# EAGLE board AugmentedStethoscope_v2 (EAGLE 8.6.3)
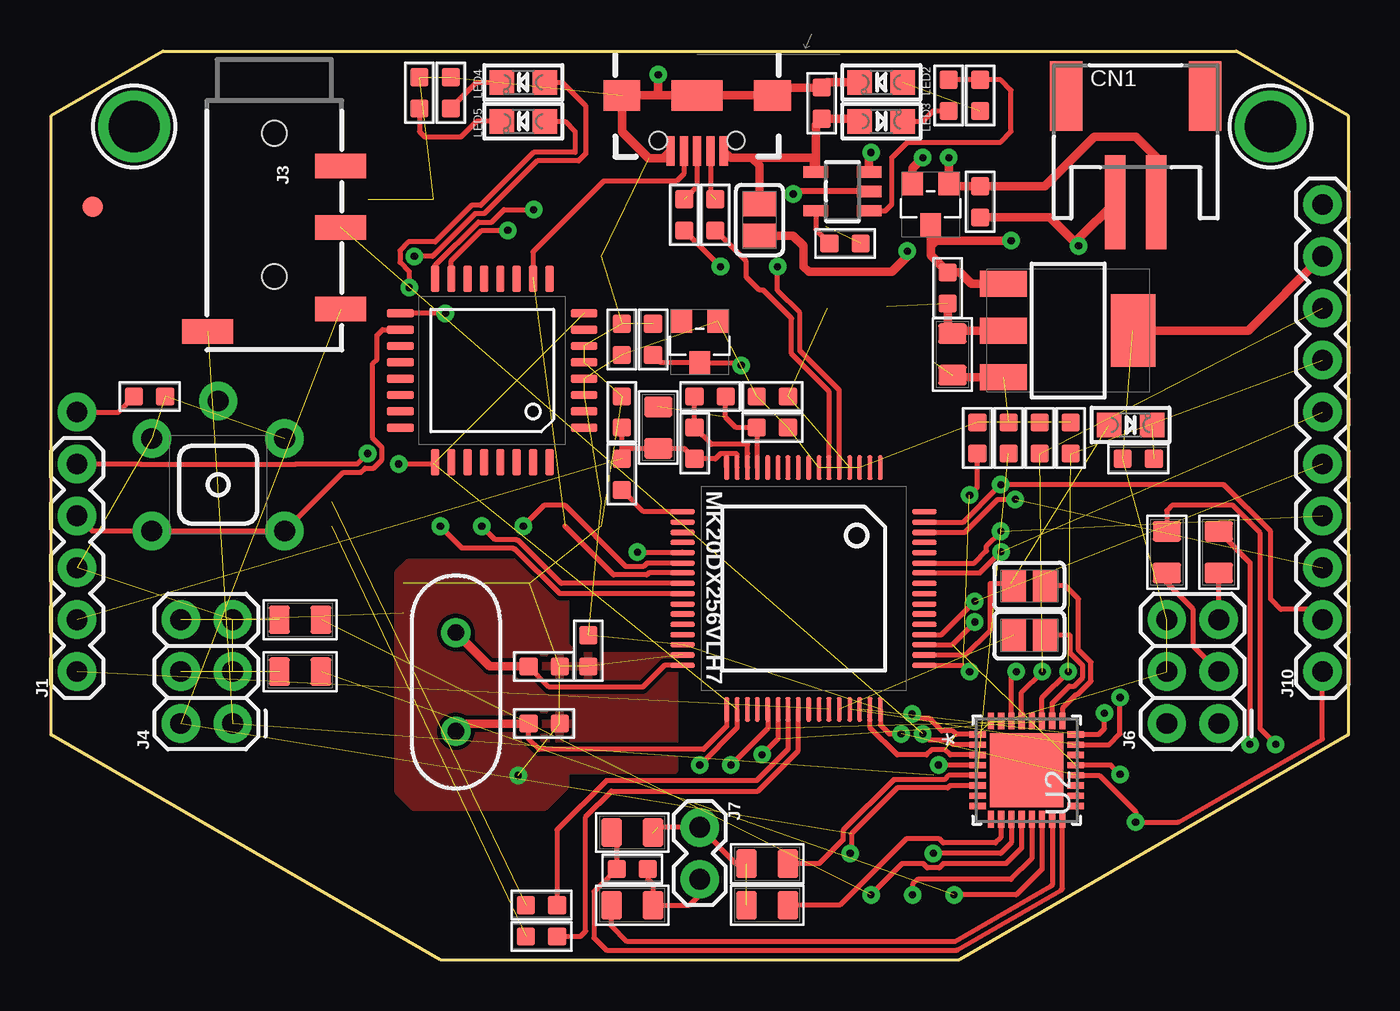
[diagram p0: board, top side]
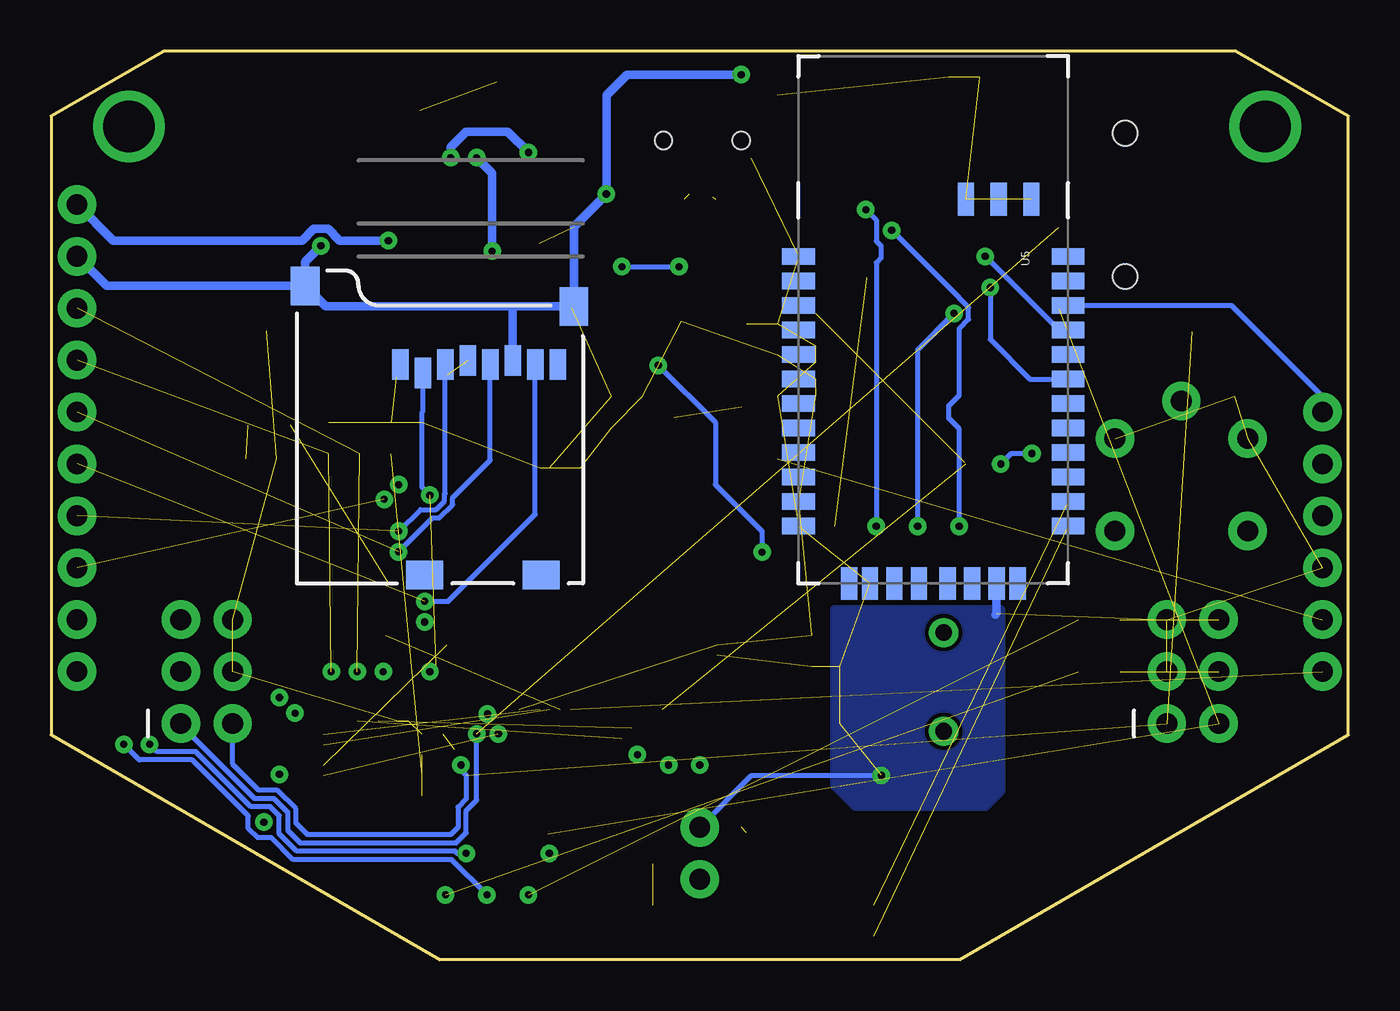
[diagram p1: board, bottom side, seen from below]

Size 63.5 x 44.45 mm. Coordinates in mm from the lower left corner, seen from the top.
Outline: 5.5,44.45 58,44.45 63.5,41.28 63.5,11 44.45,0 19.05,0 0,11 0,41.28 5.5,44.45
Copper layers (1*16): Top 0.035mm / dielectric 1.5mm / Bottom 0.035mm
Design rules "SparkFun *": minimum track width 8mil, minimum drill 10mil, track to track 6mil, track to pad 6mil, pad to pad 6mil, via to via 6mil, smd to smd 4mil, copper to edge 10mil, drill to drill 8mil, minimum pad ring 12mil, minimum via ring 10mil, stop-mask expansion 4mil, vias tented up to drill 25mil, thermal gap 8mil
Net classes: 0 default: width 0.254 mm, drill 0.203 mm, clearance 0.152 mm; 1 power: width 0.406 mm, drill 0.203 mm, clearance 0.203 mm

## Footprints (pad centres in the part's own frame; a part is rotated, then mirrored left to right if it is on the bottom)
C0603 = smd 0.889 x 0.889: 1 0,0.762; 2 0,-0.762
C0805 = smd 1.397 x 1.016: 1 0,1.016; 2 0,-1.016
JSTPH2 = smd 1 x 4.6: 1 -1,-3.7; 2 1,-3.7 | smd 1.6 x 3.4: NC1 -3.4,1.5; NC2 3.4,1.5
FIDUCIAL_1MM = smd 1 x 1: 1 0,0
HC49US = drill 0.813: 1 -2.413,0; 2 2.413,0
1X05 = drill 1.016 pad 1.88: 1 0,0; 2 2.54,0; 3 5.08,0; 4 7.62,0; 5 10.16,0
AUDIO_JACK_3.5MM_TRRS_SMD_RA = smd 1.2 x 2.5: EARTH 11.3,-3.25; RING1 6.2,3.25; RING2 3.2,3.25; TIP 10.2,3.25 | hole 1.2: 1.6,0; 8.6,0
2X3 = drill 1.016 pad 1.88: 1 0,0; 2 0,2.54; 3 2.54,0; 4 2.54,2.54; 5 5.08,0; 6 5.08,2.54
1X02 = drill 1.016 pad 1.88: 1 0,0; 2 2.54,0
USB-B-MICRO-SMD = smd 1.45 x 0.4: D+ 2.725,0; D- 2.725,0.65; GND 2.725,-1.3; ID 2.725,-0.65; VBUS 2.725,1.3 | smd 1.5 x 1.8: SHIELD1 0,3.685; SHIELD2 0,-3.685 | smd 1.5 x 2.5: SHIELD3 0,0 | hole 0.85: 2.2,1.9; 2.2,-1.9
1X10 = drill 1.016 pad 1.88: 1 0,0; 2 2.54,0; 3 5.08,0; 4 7.62,0; 5 10.16,0; 6 12.7,0; 7 15.24,0; 8 17.78,0; 9 20.32,0; 10 22.86,0
1X01NS = drill 1.016 pad 1.88: 1 0,0
LQFP32-08 = smd 1.3 x 0.4: 1 -4.493,2.8; 2 -4.493,2; 3 -4.493,1.2; 4 -4.493,0.4; 5 -4.493,-0.4; 6 -4.493,-1.2; 7 -4.493,-2; 8 -4.493,-2.8; 17 4.493,-2.8; 18 4.493,-2; 19 4.493,-1.2; 20 4.493,-0.4; 21 4.493,0.4; 22 4.493,1.2; 23 4.493,2; 24 4.493,2.8 | smd 0.4 x 1.3: 9 -2.8,-4.493; 10 -2,-4.493; 11 -1.2,-4.493; 12 -0.4,-4.493; 13 0.4,-4.493; 14 1.2,-4.493; 15 2,-4.493; 16 2.8,-4.493; 25 2.8,4.493; 26 2,4.493; 27 1.2,4.493; 28 0.4,4.493; 29 -0.4,4.493; 30 -1.2,4.493; 31 -2,4.493; 32 -2.8,4.493
LQFP64-05 = smd 1.2 x 0.25: 1 -5.915,3.759; 2 -5.915,3.251; 3 -5.915,2.743; 4 -5.915,2.261; 5 -5.915,1.753; 6 -5.915,1.245; 7 -5.915,0.762; 8 -5.915,0.254; 9 -5.915,-0.254; 10 -5.915,-0.762; 11 -5.915,-1.245; 12 -5.915,-1.753; 13 -5.915,-2.261; 14 -5.915,-2.743; 15 -5.915,-3.251; 16 -5.915,-3.759; 33 5.915,-3.759; 34 5.915,-3.251; 35 5.915,-2.743; 36 5.915,-2.261; 37 5.915,-1.753; 38 5.915,-1.245; 39 5.915,-0.762; 40 5.915,-0.254; 41 5.915,0.254; 42 5.915,0.762; 43 5.915,1.245; 44 5.915,1.753; 45 5.915,2.261; 46 5.915,2.743; 47 5.915,3.251; 48 5.915,3.759 | smd 0.25 x 1.2: 17 -3.759,-5.915; 18 -3.251,-5.915; 19 -2.743,-5.915; 20 -2.261,-5.915; 21 -1.753,-5.915; 22 -1.245,-5.915; 23 -0.762,-5.915; 24 -0.254,-5.915; 25 0.254,-5.915; 26 0.762,-5.915; 27 1.245,-5.915; 28 1.753,-5.915; 29 2.261,-5.915; 30 2.743,-5.915; 31 3.251,-5.915; 32 3.759,-5.915; 49 3.759,5.915; 50 3.251,5.915; 51 2.743,5.915; 52 2.261,5.915; 53 1.753,5.915; 54 1.245,5.915; 55 0.762,5.915; 56 0.254,5.915; 57 -0.254,5.915; 58 -0.762,5.915; 59 -1.245,5.915; 60 -1.753,5.915; 61 -2.261,5.915; 62 -2.743,5.915; 63 -3.251,5.915; 64 -3.759,5.915
CHIPLED_0805 = smd 1.2 x 1.2: A 0,-1.05; C 0,1.05
R0603 = smd 0.889 x 0.889: 1 0,0.762; 2 0,-0.762
SOT-23 = smd 1.016 x 1.143: 1 -0.889,-1.016; 2 0.889,-1.016; 3 0,1.016
L0603 = smd 0.889 x 0.889: 1 -0.762,0; 2 0.762,0
ALPS_SKHH = drill 1.016 pad 1.88: 1 -3.251,2.261; 2 3.251,2.261; 3 -3.251,-2.261; 4 3.251,-2.261; 5 0,-4.1
SOLDERJUMPER = smd 1.168 x 1.6: 1 -0.762,0; 2 0.762,0
SOT-223 = smd 1.27 x 2.286: 1 -2.286,-3.175; 2 0,-3.175; 3 2.286,-3.175 | smd 3.556 x 2.159: PAD 0,3.175
MICRO-SD-SOCKET-PP = smd 0.8 x 1.5: 1 -8.94,10.7; 2 -7.84,10.3; 3 -6.74,10.7; 4 -5.64,10.9; 5 -4.54,10.7; 6 -3.44,10.9; 7 -2.34,10.7; 8 -1.24,10.7 | smd 1.8 x 1.4: CD1 -7.75,0.4; CD2 -2.05,0.4 | smd 1.4 x 1.9: GND1 -13.6,14.55; GND2 -0.45,13.55
QFN32 = smd 0.305 x 0.813: 1 1.75,2.4; 2 1.25,2.4; 3 0.75,2.4; 4 0.25,2.4; 5 -0.25,2.4; 6 -0.75,2.4; 7 -1.25,2.4; 8 -1.75,2.4; 17 -1.75,-2.4; 18 -1.25,-2.4; 19 -0.75,-2.4; 20 -0.25,-2.4; 21 0.25,-2.4; 22 0.75,-2.4; 23 1.25,-2.4; 24 1.75,-2.4 | smd 0.813 x 0.305: 9 -2.4,1.75; 10 -2.4,1.25; 11 -2.4,0.75; 12 -2.4,0.25; 13 -2.4,-0.25; 14 -2.4,-0.75; 15 -2.4,-1.25; 16 -2.4,-1.75; 25 2.4,-1.75; 26 2.4,-1.25; 27 2.4,-0.75; 28 2.4,-0.25; 29 2.4,0.25; 30 2.4,0.75; 31 2.4,1.25; 32 2.4,1.75 | smd 3.607 x 3.607: HTAB 0,0
SOT23-5 = smd 0.55 x 1.2: 1 -0.95,-1.3; 2 0,-1.3; 3 0.95,-1.3; 4 0.95,1.3; 5 -0.95,1.3
RN41 = smd 0.8 x 1.6: 1 -6.6,-6.6; 2 -5.4,-6.6; 3 -4.2,-6.6; 4 -3,-6.6; 5 -1.8,-6.6; 6 -0.6,-6.6; 7 0.6,-6.6; 8 1.8,-6.6; 9 3,-6.6; 10 4.2,-6.6; 11 5.4,-6.6; 12 6.6,-6.6; 13 6.6,6.6; 14 5.4,6.6; 15 4.2,6.6; 16 3,6.6; 17 1.8,6.6; 18 0.6,6.6; 19 -0.6,6.6; 20 -1.8,6.6; 21 -3,6.6; 22 -4.2,6.6; 23 -5.4,6.6; 24 -6.6,6.6 | smd 1.6 x 0.8: 25 -9.4,4.8; 26 -9.4,3.2; 27 -9.4,1.6; 28 9.4,3.1; 29 9.4,-3.1; 30 9.4,-4.122; 31 9.4,-1.9; 32 9.4,-0.7; 33 9.4,0.7; 34 9.4,1.9; 35 9.4,4.122
MOUNTINGHOLE_2.5_PLATED = drill 2.5 pad 3.2: P$1 0,0

## Placement (x,y rotation side)
C2  0.1uF  [C0603]  27.94,30.35 180 top
C3  0.1uF  [C0603]  29.46,30.35 180 top
C4  0.1uF  [C0603]  43.89,32.86 0 top
C5  2.2uF  [C0805]  29.72,26.03 0 top
C6  2.2uF  [C0805]  57.15,19.93 0 top
C7  2.2uF  [C0805]  12.19,16.63 270 top
C8  22pF  [C0603]  24.13,14.34 90 top
C9  2.2uF  [C0805]  54.61,19.93 0 top
C10  2.2uF  [C0805]  12.19,14.09 270 top
C11  22pF  [C0603]  24.13,11.55 90 top
C12  0.1uF  [C0603]  26.29,15.11 0 top
C13  0.1uF  [C0603]  31.5,25.27 0 top
C14  0.15uF  [C0805]  35.05,2.66 270 top
C15  2.2uF  [C0805]  44.12,29.61 180 top
C16  0.1uF  [C0603]  35.31,27.55 90 top
C17  0.1uF  [C0603]  27.94,23.74 180 top
C18  0.1uF  [C0805]  28.45,2.66 90 top
C19  2.2uF  [C0805]  35.05,4.69 270 top
C20  2.2uF  [C0805]  28.45,6.22 90 top
C21  10uF  [C0603]  37.72,41.9 180 top
C22  10uF  [C0603]  45.47,37.08 0 top
CN1  JSTPH  [JSTPH2]  53.09,40.76 0 top
FID2  FIDUCIAL""  [FIDUCIAL_1MM]  2.03,36.82 0 top
FID3  FIDUCIAL""  [FIDUCIAL_1MM]  75.69,14.6 0 top  (outside the outline)
GND  16MHz  [HC49US]  19.81,13.58 270 top
J1  [1X05]  1.27,14.09 90 top
J3  AUDIO_JACK_TRRSSMD_RA  [AUDIO_JACK_3.5MM_TRRS_SMD_RA]  10.92,42.03 270 top
J4  FEMALE 2x3  [2X3]  8.89,11.55 90 top
J6  FEMALE 2x3  [2X3]  57.15,11.55 90 top
J7  [1X02]  31.75,6.47 270 top
J8  [USB-B-MICRO-SMD]  31.62,42.28 270 top
J10  [1X10]  62.23,14.09 90 top
JP1  M01SMDNS  [1X01NS]  1.27,26.79 90 top
K1  MKL04Z32VLC4  [LQFP32-08]  21.59,28.82 180 top
K2  MK20DX256VLH7  [LQFP64-05]  36.83,18.15 270 top
LED1  BLUE  [CHIPLED_0805]  52.83,26.15 270 top
LED2  GREEN  [CHIPLED_0805]  40.64,42.92 90 top
LED3  RED  [CHIPLED_0805]  40.64,41.01 270 top
LED4  RED  [CHIPLED_0805]  23.11,42.92 90 top
LED5  GREEN  [CHIPLED_0805]  23.11,41.01 90 top
R1  10K  [R0603]  45.34,25.52 180 top
R2  [SOT-23]  31.75,30.22 180 top
R3  [L0603]  27.94,26.79 270 top
R4  [L0603]  35.31,26.03 0 top
R5  470  [R0603]  32.26,27.55 270 top
R6  33  [R0603]  32.51,36.44 0 top
R7  33  [R0603]  30.99,36.44 0 top
R8  [L0603]  46.86,25.52 90 top
R9  2.2K  [R0603]  28.45,4.44 270 top
R10  470  [R0603]  53.21,24.5 90 top
R11  10K  [R0603]  48.39,25.52 180 top
R12  10K  [R0603]  49.91,25.52 180 top
R13  10K  [R0603]  24,2.66 270 top
R14  470  [R0603]  43.94,42.28 180 top
R15  470  [R0603]  45.47,42.28 180 top
R16  10K  [R0603]  24,1.14 270 top
R18  330  [R0603]  19.56,42.41 0 top
R19  2K  [R0603]  38.86,35.04 270 top
R20  10K  [R0603]  4.83,27.55 270 top
R21  [SOT-23]  43.05,36.95 180 top
R22  330  [R0603]  18.03,42.41 0 top
S1  [ALPS_SKHH]  8.18,23.23 180 top
SJ1  [SOLDERJUMPER]  47.88,15.87 180 top
SJ2  [SOLDERJUMPER]  47.88,18.28 180 top
SJ3  [SOLDERJUMPER]  34.67,36.19 270 top
T1  MCP1825S  [SOT-223]  49.78,30.78 270 top
U1  microSD  [MICRO-SD-SOCKET-PP]  37.47,18.41 0 bottom
U2  SGTL5000XNAA3R2  [QFN32]  47.75,9.26 90 top
U4  MCP73831T-2ACI/OT  [SOT23-5]  38.73,37.58 90 top
U5  BLUETOOTH-RN41  [RN41]  20.32,27.81 270 bottom
U$1  MOUNTINGHOLE2.5  [MOUNTINGHOLE_2.5_PLATED]  59.69,40.76 0 top
U$15  MOUNTINGHOLE2.5  [MOUNTINGHOLE_2.5_PLATED]  4.06,40.76 180 top

## Library data of the parts
C2-C4 C12 C13 C16 C17 C21 C22 = t32_ref; DESC: 0.1uF / 16VDC / X7R; MF: Murata Electronics; MPN: GRM188R71C104KA01D; OC_MOUSER: 81-GRM39X104K16; PACKAGE: 0603; TYPE: Capacitor
C5-C7 C9 C10 C14 C15 C18-C20 = t32_ref; DESC: 2.2uF / 25 VDC / X7R; MF: Taiyo Yuden; MPN: TMK212B7225KG-TR; OC_MOUSER: 963-TMK212B7225KG-TR; PACKAGE: 0805; TYPE: Capacitor
C8 C11 = t32_ref; DESC: 22pF / 50VDC / C0G (NP0); MF: Vishay / Vitramon; MPN: VJ0603A220JXACW1BC; OC_MOUSER: 77-VJ0603A220JXACBC; PACKAGE: 0603; TYPE: Capacitor
CN1 LED1-LED5 U4 = microbuilder
FID2 FID3 U$1 U$15 = microbuilder; BOM: EXCLUDE
GND = t32_ref; DESC: 16MHz / 18pF / 10ppm; MF: ABRACON; MPN: ABL-16.000MHz-B1U; OC_MOUSER: 815-ABL-16-B1U; PACKAGE: HC-49US; TYPE: Crystal
J1 J7 = SparkFun-Connectors
J3 = SparkFun-Connectors; PROD_ID: CONN-10676; SF_ID: PRT-12639
J4 J6 = SparkFun-Connectors; PROD_ID: CONN-11566
J8 = SparkFun-Connectors; PROD_ID: CONN-11752
J10 = SparkFun-Connectors; PROD_ID: CONN-11563
JP1 U1 = SparkFun
K1 = t32_ref; DESC: MKL04Z32VLC4 (preprogrammed); MF: PJRC; MPN: IC_MKL04Z32_TQFP32; PACKAGE: LQFP-32; TYPE: Microcontroller
K2 = t32_ref; DESC: MK20DX256VLH7; MF: NXP; MPN: MK20DX256VLH7; OC_MOUSER: 841-MK20DX256VLH7; PACKAGE: LQFP-64; TYPE: Microcontroller
R1 R5 R9-R12 R18-R20 R22 = t32_ref; DESC: 470R / 1 % / 0.1 W; MF: Vishay; MPN: CRCW0603470RFKEA; OC_MOUSER: 71-CRCW0603-470-E3; PACKAGE: 0603; TYPE: Resistor
R2 R21 = t32_ref; DESC: Dual Schottky, common cat; MF: NXP Semiconductors; MPN: BAT54C,215; OC_MOUSER: 771-BAT54C-T/R; PACKAGE: SOT-23; TYPE: Diode
R3 R4 R8 = t32_ref; DESC: 600R / 100MHz; MF: Murata Electronics; MPN: BLM18AG601SN1D; OC_MOUSER: 81-BLM11A601S; PACKAGE: 0603; TYPE: Ferrite
R6 R7 R13-R16 = t32_ref; DESC: 33R / 1% / 0.25 W; MF: Panasonic; MPN: ERJ-PA3F33R0V; OC_MOUSER: 667-ERJ-PA3F33R0V; PACKAGE: 0603; TYPE: Resistor
S1 = t32_ref; DESC: SPST; MF: ALPS; MPN: SKHHPKA010; OC_MOUSER: 688-SKHHPK; PACKAGE: 6x6x5 MM; TYPE: Tactile switch
SJ1-SJ3 = t32_ref
T1 = t32_ref; DESC: 3.3V 500mA; MF: Microchip Technology; MPN: MCP1825S-3302E/DB; OC_MOUSER: 579-MCP1825S-3302EDB; PACKAGE: SOT-223-3; TYPE: Voltage regulator
U2 = pd3d_augmentedstethoscope; MANUFACTURER_PART_NUMBER: SGTL5000XNAA3R2; VENDOR: Freescale
U5 = ScratchPad

## Nets
0/RX1: K2.39 R13.1
1/TX1: K2.40 R16.1
2: K2.57
3.3V [power]: C2.1 C12.1 C15.1 C16.1 J10.1 K1.3 K1.4 K2.3 K2.7 K2.30 K2.48 R1.2 R2.1 R4.2 R8.2 R11.2 R12.2 T1.3 U1.4 U2.20 U5.11
3/PWM: K2.28
4/PWM: K2.29
5/PWM: K2.64
6/PWM: K2.61
7/SPI_MOSI: J10.4 K2.59 U1.3
8: K2.60
9: K2.46 U2.24
10/SPI_CS: K2.49 R1.1 U1.2
11: K2.51 U2.21
12/SPI_MISO: J10.5 K2.52 U1.7
13/LED: K2.50 LED1.A SJ2.2
14/SPI_SCK: J10.6 K2.58 U1.5
15/A1: J1.1 K2.43
16/A2: K2.35
17/A3: K2.36
18/A4/SDA: J10.7 K2.38 R12.1 U2.27
19/A5/SCL: J10.8 K2.37 R11.1 U2.29
20/A6/SPI_CS: J10.3 K2.62
21/A7/SPI_CS: J10.2 K2.63
22/A8: K2.44 SJ1.2
23/A9: K2.45 U2.23
24: K2.27
25/PWM: K2.42
26/A15: K2.2
27/A16: K2.54
28/A17: K2.53
29/A18: K2.55
30/A19: K2.56
31/A20: K2.1
32/TOUCH: K2.41
33/TOUCH: K2.26
A12: K2.11
A13: K2.12
AGND: C5.2 C13.2 C17.2 J1.2 K2.15 K2.16 R3.2
D3: LED4.C R18.2
D4: LED5.C R22.2
D+: J8.D+ R7.1
D-: J8.D- R6.1
DAC/A14: K2.18
DETECT: U1.CD2
GND [power]: C2.2 C3.2 C4.2 C8.2 C11.2 C12.2 C14.2 C15.2 C16.2 C19.2 C20.2 C21.2 C22.2 CN1.1 J1.3 J4.3 J4.5 J6.4 J6.6 J7.1 J8.GND J8.SHIELD1 J8.SHIELD2 J8.SHIELD3 J10.9 K1.5 K1.6 K2.4 K2.31 K2.47 LED2.C R3.1 R10.1 R18.1 R19.1 R20.1 R22.1 S1.3 S1.4 T1.2 T1.PAD U1.6 U1.GND1 U1.GND2 U2.1 U2.3 U2.7 U2.31 U2.32 U4.2 U5.1 U5.12 U5.25 U5.27 U5.28 U5.29
HPGND: J3.EARTH J4.1 J6.2 U2.4
HPL: J3.TIP J4.2 U2.6
HPR: J3.RING1 J6.1 U2.2
ID: J8.ID K1.10 K2.23
LIL: C10.2 J4.4
LIL_ISO: C10.1 U2.14
LIR: C9.2 J6.3
LIR_ISO: C9.1 U2.13
LOL: C7.2 J4.6
LOL_ISO: C7.1 U2.12
LOR: C6.2 J6.5
LOR_ISO: C6.1 U2.11
MIC: C18.2 J7.2 R9.1
MIC_BIAS: C20.1 R9.2 U2.16
N$1: C22.1 CN1.2 R21.1 U4.3
N$2: K1.16 K2.22
N$3: K1.17 K2.24
N$4: C14.1 U2.10
N$5: C8.1 GND.1 K2.32
N$6: C11.1 GND.2 K2.33
N$7: C13.1 K2.14 R5.2
N$9: SJ1.1 U2.26
N$10: K2.5 R7.2
N$11: C17.1 K2.17
N$12: U2.30
N$13: SJ2.1 U2.25
N$14: K2.6 R6.2
N$15: C5.1 K2.13 R4.1 R5.1
N$18: R21.2 SJ3.2
N$52: LED1.C R10.2
N$68: C3.1 K2.21 R2.3
N$70: K1.15 K2.25
N$71: LED3.C R14.1
N$72: R14.2 R15.2 U4.1
N$73: LED4.A U5.21
N$74: LED5.A U5.19
N$75: R19.2 U4.5
N$76: LED2.A R15.1
N$79: C19.1 R8.1 U2.5
N$80: C18.1 U2.15
PIO4: JP1.1 R20.2 U5.22
PROG: J1.4 K1.18 S1.1 S1.2
RESET: J1.5 K1.8 K1.25 K2.34
SMIRF_CTS: U5.16
SMIRF_RTS: U5.15
SMIRF_RX: R16.2 U5.13
SMIRF_TX: R13.2 U5.14
V_USB [power]: C21.1 J8.VBUS LED3.A SJ3.1 U4.4
VIN [power]: C4.1 J10.10 R21.3 T1.1
VRTC: R2.2

## Tracks (layer width: path | path; a pad name or v marks a point on that pad's centre or on a via)
0/RX1
  Top 0.254: R13.1 24.77,6.34 27.18,8.76 34.53,8.76 36.07,10.29 K2.39
1/TX1
  Top 0.254: R16.1 25.91,1.14 26.16,1.39 26.16,6.98 27.43,8.25 34.6,8.25 36.58,10.23 K2.40
3.3V  (via drill 0.35)  (18 unrouted)
  Top 0.254: U2.20 51.3,9.01 53.09,7.23 v53.09,6.72 55.18,6.72 62.23,10.79 J10.1 | K2.48 40.59,11.48 41.03,11.04 v41.61,11.04
  Top 0.406: T1.3 44.22,28.49 C15.1
7/SPI_MOSI  (via drill 0.35)  (1 unrouted)
  Top 0.254: K2.59 45.19,19.4 45.79,20 45.79,20.24 46.48,20.93 v46.48,20.96
  Bottom 0.254: 46.48,20.95 v46.48,20.96 45.42,22.02 44.66,22.02 44.25,22.43 44.25,22.77 44.2,22.81 U1.3
9  (via drill 0.35)  (1 unrouted)
  Top 0.254: U2.24 51.28,11.01 51.56,11.3 v51.56,12.06
10/SPI_CS  (via drill 0.35)  (1 unrouted)
  Top 0.254: v44.96,22.73 45.34,23.11 R1.1 | K2.49 44.65,14.39 v44.96,14.09
  Bottom 0.254: U1.2 45.3,26.82 45.36,26.76 45.36,23.13 v44.96,22.73
11  (via drill 0.35)  (1 unrouted)
  Top 0.254: K2.51 44.11,15.41 v45.21,16.52 | U2.21 51.88,9.51 v52.33,9.06
12/SPI_MISO  (via drill 0.35)  (1 unrouted)
  Top 0.254: K2.52 43.58,15.89 v45.21,17.53
  Bottom 0.254: v45.21,17.53 44.06,17.53 39.8,21.78 U1.7
13/LED  (1 unrouted)
  Top 0.254: K2.50 44.76,14.9 45.97,16.12 45.97,18.41 46.99,18.41 SJ2.2
14/SPI_SCK  (via drill 0.35)  (1 unrouted)
  Top 0.254: K2.58 45.47,18.92 v46.5,19.95
  Bottom 0.254: 46.28,19.73 v46.5,19.95 46.2,20.25 46.19,20.25 44.83,21.61 44.5,21.61 43.84,22.26 43.84,22.6 42.01,24.44 U1.5
15/A1  (1 unrouted)
18/A4/SDA  (via drill 0.35)  (3 unrouted)
  Top 0.254: U2.27 48.5,12.81 v49.78,14.09 | K2.38 35.59,10.81 v34.8,10.03
19/A5/SCL  (via drill 0.35)  (3 unrouted)
  Top 0.254: U2.29 47.5,13.08 v48.51,14.09 | K2.37 35.08,11.32 v33.27,9.52
20/A6/SPI_CS  (via drill 0.35)  (1 unrouted)
  Top 0.254: v47.2,22.52 46.34,22.52 44.72,20.9 K2.62
21/A7/SPI_CS  (via drill 0.35)
  Top 0.152: 46.36,23.11 v46.48,23.23
  Top 0.254: K2.63 44.65,21.4 46.36,23.11 | J10.2 61.72,17.14 60.2,17.14 59.69,17.65 59.69,20.95 57.41,23.23 v46.49,23.23 v46.48,23.23
22/A8  (1 unrouted)
23/A9  (via drill 0.35)  (1 unrouted)
  Top 0.254: U2.23 51.8,10.51 52.32,11.04 v52.32,12.82
AGND  (1 unrouted)
  Top 0.254: C17.2 27.94,25.01 | 27.94,25.01 R3.2 | 27.94,25.01 C5.2 30.99,25.01 C13.2 32.51,24.5 32.77,24.76 33.02,24.76 | K2.15 33.58,24.71 33.53,24.76 33.02,24.76 | K2.16 33.07,24.71 33.02,24.76
D3
  Top 0.254: R18.2 20.83,42.92 LED4.C
D4
  Top 0.254: LED5.C 20.83,41.01 20.07,40.25 18.29,40.25 18.03,40.51 R22.2
D+  (1 unrouted)
  Top 0.254: J8.D+ 31.62,37.84 31.11,37.33
D-  (1 unrouted)
  Top 0.254: J8.D- 32.27,37.44
GND  (via drill 0.35)  (38 unrouted)
  Top 0.254: C19.2 33.53,4.69 J7.1 29.72,6.47 | v42.14,12.01 42.35,11.8 42.99,11.8 43.6,11.19 44.13,11.19 44.3,11.01 U2.1 | U2.3 44.01,10.01 43.75,10.28 43.12,10.28 42.86,10.01 41.41,10.01 40.08,11.35 K2.47
  Top 0.305: U4.2 36.45,37.58 v36.32,37.46
  Top 0.406: T1.2 44.27,30.78 C15.2 43.89,30.85 C4.2 | LED2.C 37.97,42.92 C21.2 35.69,42.66 J8.SHIELD1 J8.SHIELD3 29.72,42.28 | 29.72,42.28 J8.SHIELD2 27.94,40.51 29.24,39.2 29.97,39.2 | T1.PAD 58.6,30.78 J10.9 | J8.GND 29.97,39.21 29.97,39.2 | 29.97,39.2 30.09,39.2 30.17,39.29 | v29.72,43.3 29.72,42.28 | CN1.1 50.29,35.27 v50.29,34.92 48.89,36.31 C22.2
  Bottom 0.254: 38,31.87 U1.GND2 | J7.1 29.21,9.01 v22.86,9.01
  Bottom 0.406: U5.28 17.22,16.94 17.27,16.88 | v29.72,43.3 35.31,43.3 36.32,42.28 v36.32,37.46 37.91,35.86 U1.GND2 40.89,31.96 | U1.GND1 60.78,32.96 J10.9 | 40.89,31.96 50.06,31.96 U1.GND1 | U1.6 40.91,31.95 40.89,31.96 | v50.29,34.92 51.06,34.14 U1.GND1
  pour Bottom: 17.02,17.14 25.15,17.14 25.15,8.5 24.13,7.49 17.78,7.49 17.02,8.25
  pour Top: 25.15,9.26 30.48,9.26 30.48,14.85 25.65,14.85 25.15,15.36 25.15,18.41 24.13,19.42 17.53,19.42 17.02,18.92 17.02,8.25 17.78,7.49 24.13,7.49 25.15,8.5
HPGND  (via drill 0.35)  (2 unrouted)
  Top 0.254: U2.4 v43.44,9.51 v43.43,9.52
  Bottom 0.254: v43.43,9.52 43.43,9.26 43.18,9.01 43.18,7.86 43.58,7.46 43.58,6.47 43.94,6.11 50.95,6.11 51.51,6.68 51.51,7.37 52.44,8.3 53.34,8.3 54.61,9.57 J6.2
HPL  (via drill 0.35)  (2 unrouted)
  Top 0.254: U2.6 44.01,8.51 43.9,8.4 41.42,8.4 39.17,6.15 39.17,5.25 v39.12,5.2
HPR  (via drill 0.35)  (1 unrouted)
  Top 0.254: U2.2 44.16,10.51 43.94,10.73 43.06,10.73 43.06,10.74 42.98,10.74 v42.67,11.04
  Bottom 0.254: v42.67,11.04 42.67,7.8 43.18,7.29 43.18,6.2 43.67,5.71 51.31,5.71 51.92,6.32 51.92,7.21 52.6,7.89 53.56,7.89 57.15,11.48 J6.1
ID  (2 unrouted)
  Top 0.254: K2.23 29.26,18.92 29.16,18.82 27.53,18.82 25.15,21.2 | J8.ID 30.97,38.46 30.61,38.09 27.05,38.09 23.59,34.63 23.59,33.39
LIL  (1 unrouted)
LIL_ISO  (via drill 0.35)  (1 unrouted)
  Top 0.254: U2.14 48.5,4.45 48.51,4.44 47.24,3.17 v44.2,3.17
LIR
  Top 0.254: C9.2 54.61,18.43 55.88,17.16 55.88,15.36 J6.3
LIR_ISO  (via drill 0.35)
  Top 0.254: U2.13 48,4.94 46.99,3.93 42.42,3.93 42.16,3.68 v42.16,3.17 | v59.94,10.53 59.18,11.3 59.18,20.88 57.84,22.22 54.86,22.22 54.61,21.96 C9.1
  Bottom 0.254: v59.94,10.53 59.18,9.77 56.59,9.77 53.84,7.03 53.84,6.41 53.4,5.96 52.71,5.96 51.64,4.89 43.89,4.89 v42.16,3.17
LOL  (1 unrouted)
LOL_ISO  (via drill 0.35)  (1 unrouted)
  Top 0.254: U2.12 47.5,5.45 46.74,4.69 43.67,4.69 43.47,4.49 42.89,4.49 42.69,4.69 41.66,4.69 v40.13,3.17
LOR
  Top 0.254: J6.5 C6.2
LOR_ISO  (via drill 0.35)
  Top 0.254: U2.11 47,5.72 46.48,5.2 v43.18,5.2 | v58.67,10.53 58.67,19.42 C6.1
  Bottom 0.254: v43.18,5.2 43.62,5.2 43.72,5.3 51.48,5.3 52.33,6.15 52.33,7.04 52.77,7.48 53.73,7.48 56.42,10.18 58.32,10.18 v58.67,10.53
MIC
  Top 0.254: R9.1 29.21,3.93 29.46,3.68 C18.2 31.24,2.66 31.75,3.17 J7.2
MIC_BIAS
  Top 0.254: C20.1 27.69,5.96 R9.2 26.89,3.64 26.88,3.64 26.57,3.32 26.57,1.07 27.18,0.46 44.33,0.46 44.36,0.48 49.43,3.4 49.5,3.48 U2.16
N$1  (via drill 0.35)
  Top 0.406: CN1.2 54.09,39.25 53.09,40.25 51.05,40.25 48.64,37.84 C22.1 44.07,37.84 R21.1 v43.94,39.24 | U4.3 40.03,39.39 v40.13,39.49
  Bottom 0.406: v40.13,39.49 41.15,40.51 43.18,40.51 43.94,39.74 v43.94,39.24
N$2  (via drill 0.35)
  Top 0.254: K2.22 29.17,19.4 29,19.22 28.14,19.22 25.15,22.22 24.13,22.22 v23.11,21.2 | v23.62,36.7 22.17,36.7 21.56,36.09 20.91,36.09 18.79,33.96 K1.16
  Bottom 0.254: v23.62,36.7 23.11,36.19 23.11,35.16 22.88,34.92 22.88,34.34 23.11,34.11 v23.11,21.2
N$3  (via drill 0.35)
  Top 0.254: K2.24 24.97,18.41 22.88,20.49 22.82,20.49 22.77,20.54 21.74,20.54 v21.08,21.2 | v19.3,31.62 K1.17
  Bottom 0.254: v21.08,21.2 21.08,29.84 v19.3,31.62
N$4
  Top 0.254: U2.10 46.48,6.84 46.48,5.96 46.23,5.71 43.67,5.71 43.47,5.91 41.86,5.91 38.61,2.66 C14.1
N$5
  Top 0.254: C8.1 24.38,13.33 28.96,13.33 30.02,14.39 K2.32
  Top 0.406: GND.1 21.46,14.34 C8.1
N$6
  Top 0.254: C11.1 23.37,10.79 23.88,10.28 31.94,10.28 33.07,11.41 K2.33
  Top 0.406: GND.2 20.19,11.55 C11.1
N$7
  Top 0.254: K2.14 34.09,24.76 34.09,25.2 32.32,25.2 C13.1 R5.2
N$9
  Top 0.254: U2.26 49,12.55 49.84,13.38 50.08,13.38 50.49,13.8 50.49,14.38 49.89,14.99 49.89,15.87 SJ1.1
N$10  (via drill 0.35)
  Top 0.254: v35.56,33.9 35.56,32.73 36.65,31.64 36.65,29.8 38.58,27.87 K2.5 | v32.77,33.9 R7.2
  Bottom 0.254: v35.56,33.9 v32.77,33.9
N$11
  Top 0.254: K2.17 29.01,21.91 C17.1
N$12  (via drill 0.35)
  Top 0.254: U2.30 47,13.85 v47.24,14.09
N$13
  Top 0.254: U2.25 49.53,11.69 49.53,12.31 50.19,12.97 50.25,12.97 50.9,13.63 50.9,14.55 50.29,15.16 50.29,17.65 49.66,18.28 SJ2.1
N$14
  Top 0.254: R6.2 34.04,34.16 34.04,33.39 34.67,32.76 34.86,32.76 36.24,31.37 36.24,29.63 38.1,27.78 38.1,25.29 38.08,25.27 K2.6
N$15  (1 unrouted)
  Top 0.254: K2.13 34.57,26 R4.1 33.53,26.03 33.02,26.54 R5.1
N$18  (via drill 0.35)
  Top 0.406: SJ3.2 36.32,35.43 36.83,34.92 36.83,33.9 37.08,33.65 41.15,33.65 41.91,34.41 v41.91,34.66 | v42.67,39.24 42.16,38.73 R21.2
  Bottom 0.406: v41.91,34.66 41.91,38.47 v42.67,39.24
N$52  (1 unrouted)
N$68  (via drill 0.35)
  Top 0.254: C3.1 29.84,29.2 R2.3 33.66,29.2 v33.78,29.08 | v28.7,19.93 30.89,19.93 K2.21
  Bottom 0.254: v33.78,29.08 30.99,26.28 30.99,23.23 28.7,20.95 v28.7,19.93
N$70  (via drill 0.35)
  Top 0.254: K2.25 24.9,17.9 22.72,20.09 22.65,20.09 22.6,20.13 20.12,20.13 v19.05,21.2 | K1.15 19.59,34.19 21.08,35.68 v22.35,35.68
  Bottom 0.254: v22.35,35.68 19.05,32.38 19.05,32.36 18.6,31.91 18.6,31.32 19.05,30.87 19.05,27.61 19.55,27.1 19.55,26.48 19.05,25.97 v19.05,21.2
N$71
  Top 0.254: LED3.C 42.67,41.01 43.18,41.52 R14.1
N$72
  Top 0.254: U4.1 40.83,36.63 41.15,36.95 41.15,39.24 41.91,40 46.48,40 46.99,40.51 46.99,42.54 46.48,43.05 R15.2 R14.2
N$73  (via drill 0.35)
  Top 0.254: LED4.A 25.02,42.92 26.16,41.78 26.16,39.42 25.82,39.08 23.79,39.08 21.2,36.49 20.74,36.49 18.66,34.41 v17.78,34.41
  Bottom 0.254: v17.78,34.41 14.18,30.81 U5.21
N$74  (via drill 0.35)
  Top 0.254: LED5.A 25.15,41.01 25.65,40.51 25.65,39.49 23.62,39.49 21.03,36.9 20.58,36.9 18.8,35.12 17.49,35.12 17.07,34.7 17.07,34.12 17.53,33.66 v17.53,32.89
  Bottom 0.254: v17.53,32.89 17.53,30.35 15.59,28.41 U5.19
N$75
  Top 0.254: U4.5 37.44,35.71 R19.2
N$76  (1 unrouted)
N$79  (1 unrouted)
  Top 0.254: C19.1 37.59,4.69 38.76,5.86 38.76,6.32 41.25,8.81 43.73,8.81 43.93,9.01 U2.5
N$80
  Top 0.254: U2.15 49,3.66 48.93,3.58 44.25,0.88 28.19,0.88 27.43,1.64 C18.1
PIO4
  Top 0.254: JP1.1 3.3,26.79 R20.2
  Bottom 0.254: U5.22 5.72,32.01 1.27,27.55 JP1.1
PROG
  Top 0.254: J1.4 2.01,20.97 S1.2 S1.1 14.3,23.84 15.15,23.84 15.36,24.05 15.79,24.05 16.2,24.46 16.2,25.05 15.75,25.51 15.75,29.17 15.95,29.37 15.95,30.55 16.22,30.82 K1.18
RESET  (via drill 0.35)  (2 unrouted)
  Top 0.254: v15.49,24.76 14.99,24.25 11.98,24.25 11.96,24.22 4.4,24.22 4.38,24.25 J1.5 | v17.02,24.25 18.71,24.25 K1.25 | K2.34 33.58,11.35 v31.75,9.52
  Bottom 0.254: v15.49,24.76 16.51,24.76 v17.02,24.25
SMIRF_RX  (1 unrouted)
SMIRF_TX  (1 unrouted)
V_USB
  Top 0.406: J8.VBUS 33.25,39.24 34.29,39.24 | 34.29,39.24 34.67,38.85 SJ3.1 | 34.29,39.24 37.34,39.24 37.34,38.63 U4.4 37.44,40.86 C21.1 39.46,41.14 LED3.A
VIN  (via drill 0.35)
  Top 0.406: 43.05,34.92 43.05,34.46 C4.1 44.48,33.62 45.03,33.06 T1.1 | 43.05,34.92 R21.3 | 43.05,34.92 43.31,35.17 v46.99,35.17
  Bottom 0.406: J10.10 60.45,35.17 51.22,35.17 50.64,35.75 49.95,35.75 49.36,35.17 v46.99,35.17